# Altium PCB USBDM_SWD_SER_JS16CWJ_shrink.PcbDoc
Units mil, origin at the board's own origin, x right, y up, seen from the top; angles counter-clockwise.
Board outline 1621.65 x 1771.65 mil, 2 copper layers (Top Layer, Bottom Layer); 39 components, 31 nets, 148 pads, 61 vias.
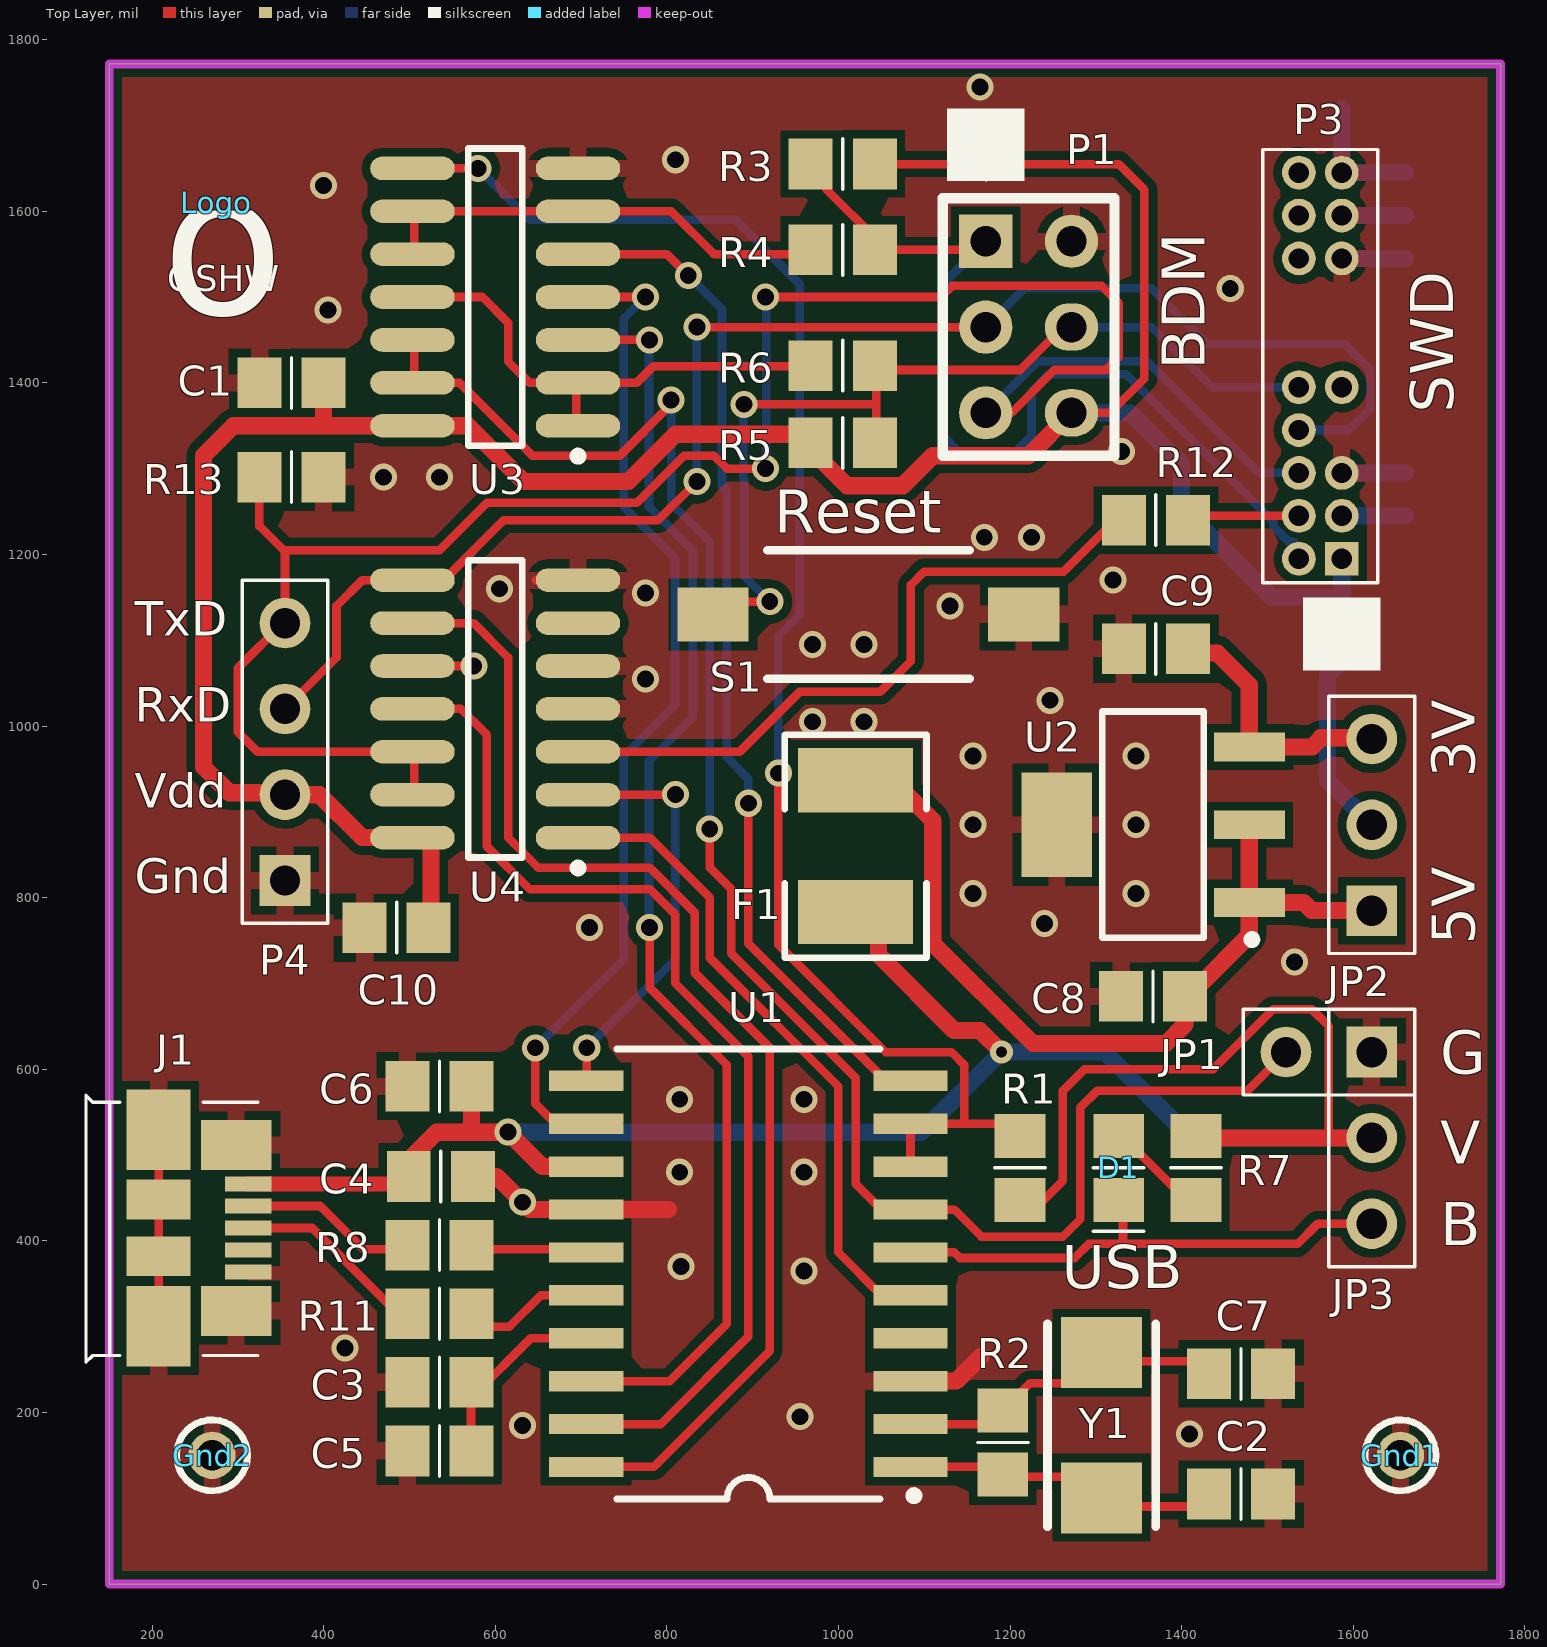
[diagram p0: Top Layer view]
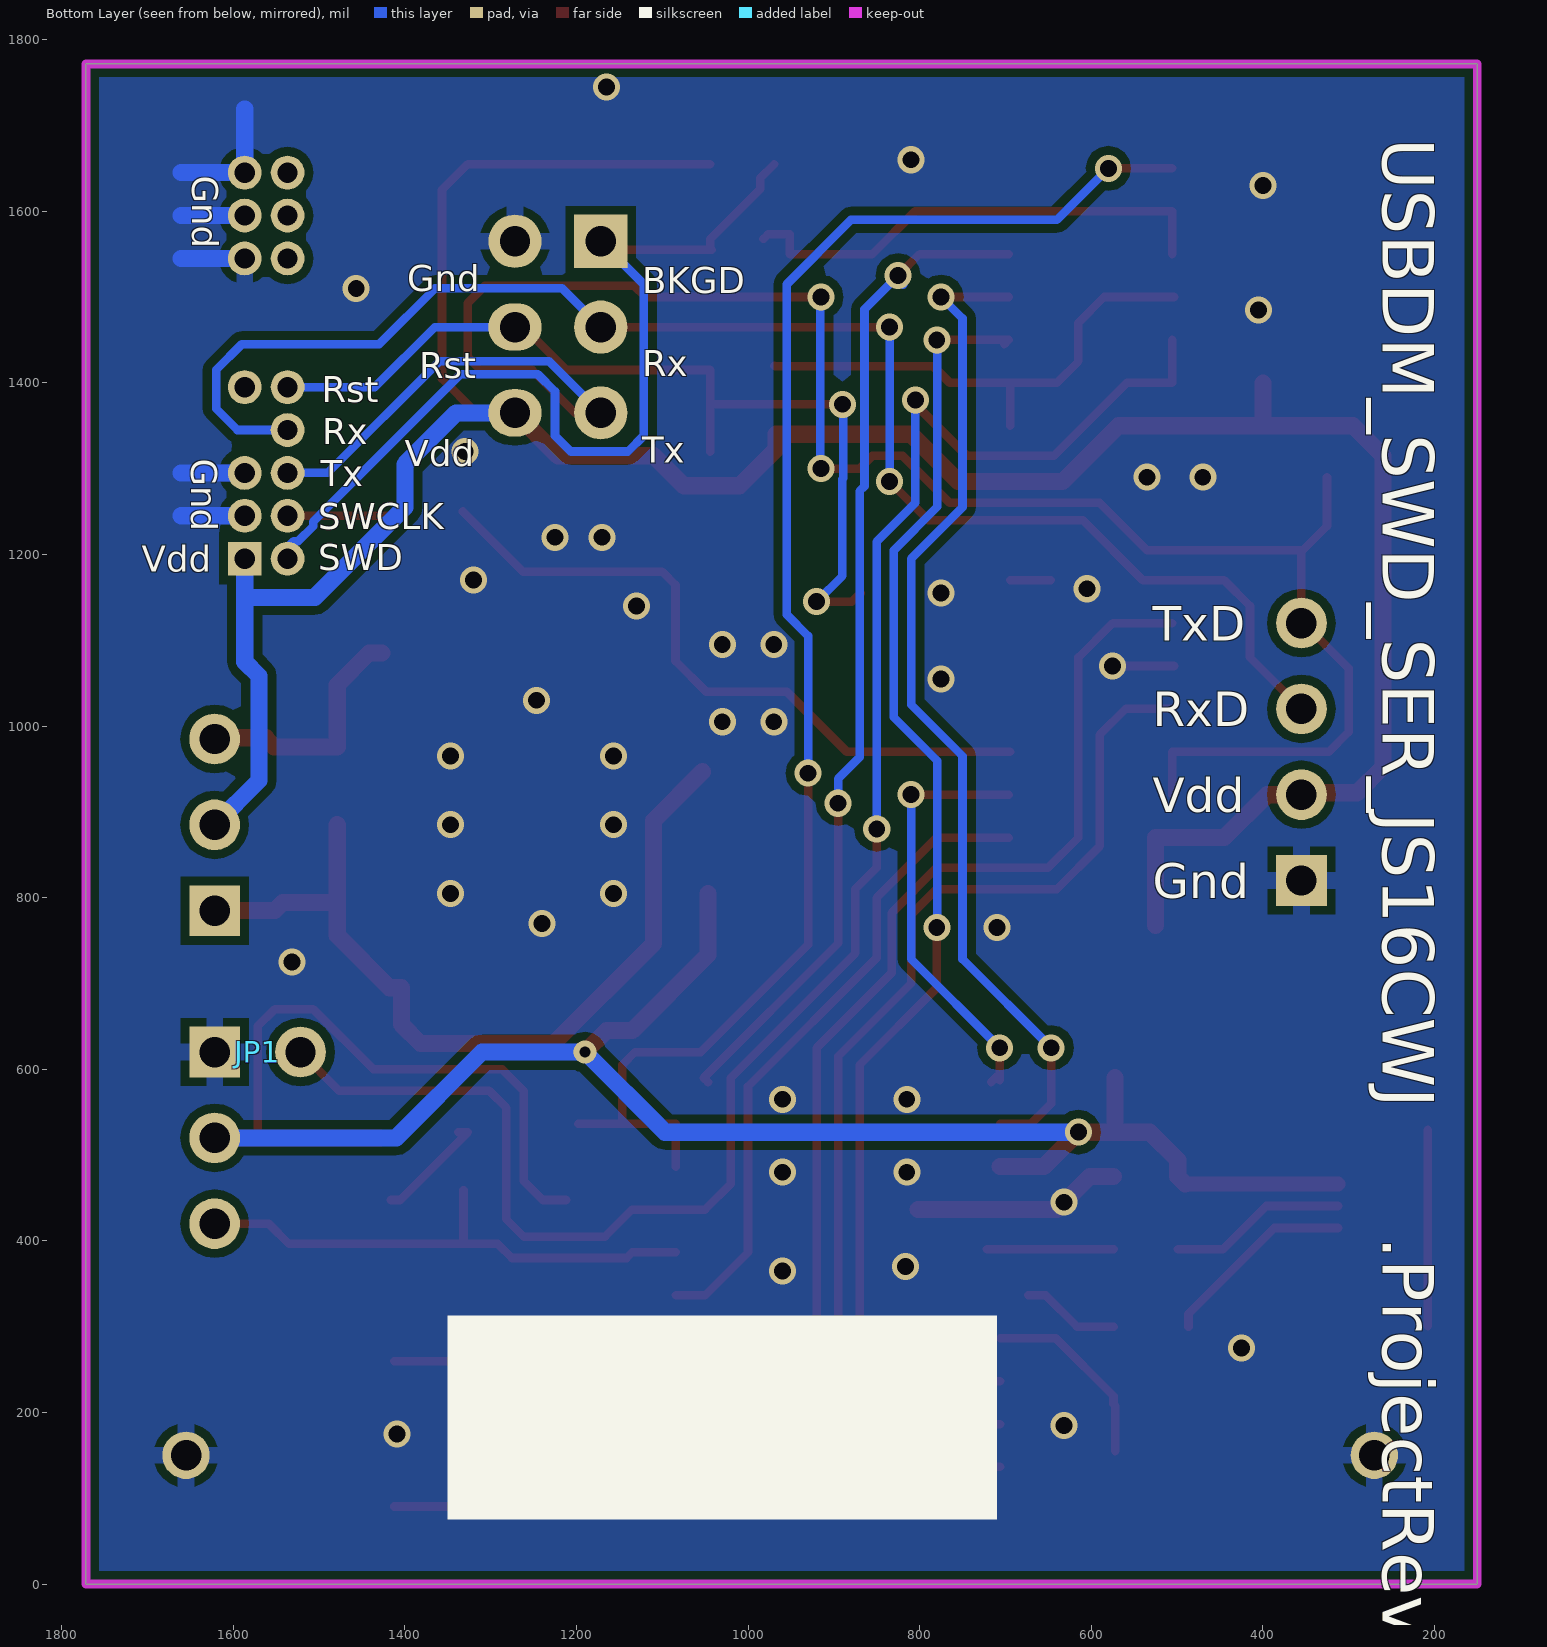
[diagram p1: Bottom Layer view, seen from below]
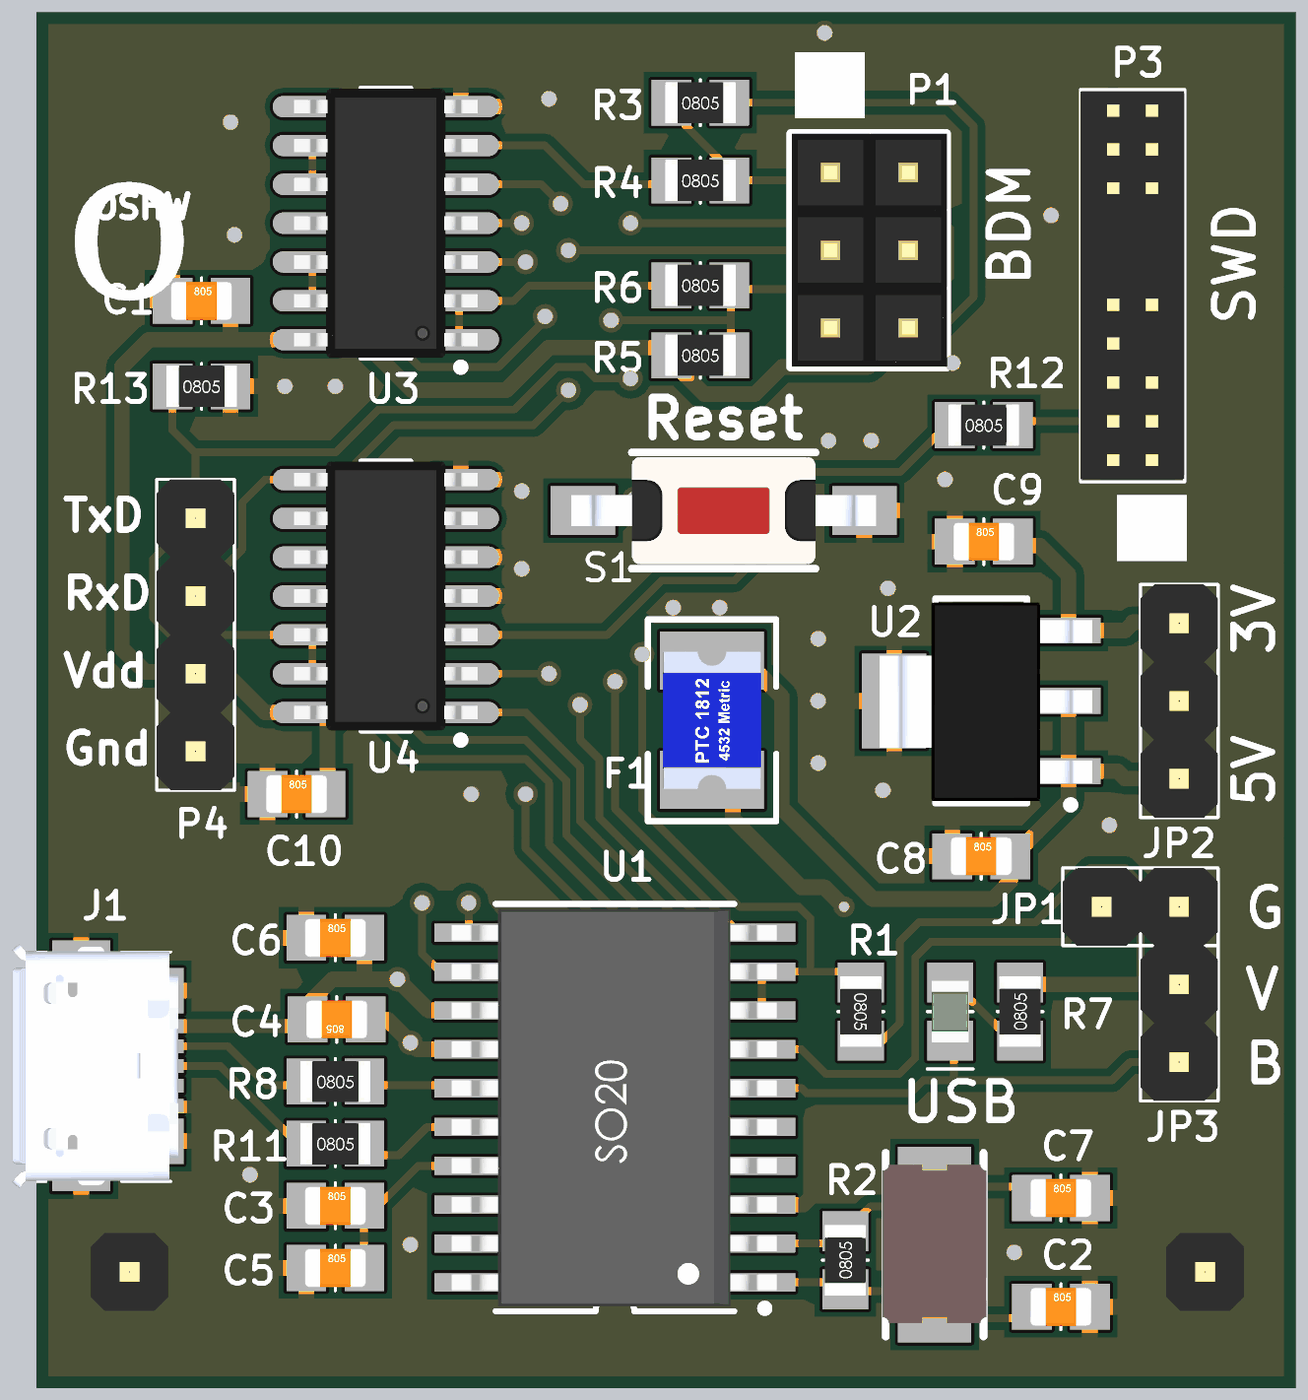
[diagram p2: 3D render of the assembled board from above, using the file's embedded part models]

## Layer stack, top to bottom
Top Solder: solder mask 0.4, Solder Resist, Dk 3.5
Top Layer: signal copper 1.4
Dielectric1: dielectric 12.6, FR-4, Dk 4.8
Bottom Layer: signal copper 1.4
Bottom Solder: solder mask 0.4, Solder Resist, Dk 3.5

## Board outline
150,0 1771.65,0 1771.65,1771.65 150,1771.65

## Design rules (kind name [scope] priority, off if disabled: settings)
Clearance "PolyGon Clearance" [All vs Inpoly] p1: gap=10
Clearance [All] p2: gap=5
FabricationTestPointUsage TestPointUsage [All] p1: valid=0 allowmultiple=FALSE
FabricationTestpoint Testpoint [All] p1: side=3 testpointundercomponent=TRUE minsize=40 maxsize=100 preferedsize=60 minholesize=0 maxholesize=40 preferedholesize=32 testpointgrid=1 allowsidetop=TRUE allowsidebottom=TRUE usegrid=TRUE gridtolerance=0.01
HoleSize [All] p1: absolutevalues=TRUE maxlimit=300 minlimit=1 maxpercent=80.000 minpercent=20.000
PolygonConnect PolygonConnect_1 [InNet('GND') vs isvia] p1: connectstyle=Direct reliefconductorwidth=10 reliefentries=4 polygonreliefangle="90 Angle" airgapwidth=10
PolygonConnect [All] p2: connectstyle=Relief reliefconductorwidth=20 reliefentries=4 polygonreliefangle="90 Angle" airgapwidth=10
RoomDefinition USBDM_SWD_SER_JS16CWJ [InComponentClass('USBDM_SWD_SER_JS16CWJ')] p1: confinementstyle=ConfineIn formatcopy=TRUE lockcomponents=FALSE outline -48.35,-10 1791.65,-10 1791.65,1805 -48.35,1805
RoutingVias [All] p1: holewidth=28 width=50 viastyle="Through Hole" minholewidth=28 minwidth=50 maxholewidth=28 maxwidth=50
SilkToSolderMaskClearance SilkscreenOverComponentPads [IsPad] p1: minsilkscreentomaskgap=10 clearancetoexposedcopper=TRUE
SolderMaskExpansion [All] p1: expansion=4
Width [All] p1: maxlimit=40 minlimit=10 preferedwidth=10
26 further rules are at their usual default settings.

## Components (designator, comment, footprint, x,y, rotation, side; value= is the part's Value field where it differs from the comment)
C1 "470nF" CCNP2012-0805 362.6,1400 r0 top
C2 "18pF" CCNP2012-0805 1469.25,105 r0 top
C3 "470nF" CCNP2012-0805 535,235 r0 top
C4 "470nF" CCNP2012-0805 536.65,475 r180 top
C5 "4u7F/10V" CCNP2012-0805 535,155 r0 top
C6 "4u7F/10V" CCNP2012-0805 535,580 r0 top
C7 "18pF" CCNP2012-0805 1469.25,245 r0 top
C8 "470nF" CCNP2012-0805 1366.65,685 r0 top
C9 "4u7F/10V" CCNP2012-0805 1370,1090 r0 top
C10 "470nF" CCNP2012-0805 485,765 r0 top
D1 "LED Green" LED2012-0805-GREEN 1326.65,485 r270 top
F1 "MINISMDC050F-2" PTC4532-1812 1020,860 r90 top
Gnd1 "TP" "PCBPIN - 0.9mm" 1655,150 r0 top
Gnd2 "TP" "PCBPIN - 0.9mm" 270,150 r0 top
J1 "USB_MICRO_B_CONNECTOR" "MOLEX - 47346-0001" 260,415 r0 top
JP1 "PIN2X1" HDR1X2S 1621.65,620 r0 bottom
JP2 "PIN3X1" HDR1X3S 1621.65,784.87 r90 top
JP3 "PIN3X1" HDR1X3S 1621.65,620 r270 top
Logo "OSHW Logo" OSHW 275,1610 r0 top
P1 "BDM2X3" BDM 1171.65,1565 r270 top
P3 "SWD-2x10" "SWD-2x10 - reduced" 1586.65,1195 r90 top
P4 "Serial" HDR1X4S 355,820 r90 top
R1 "1k5" CR2012-0805 1211.65,485 r270 top
R2 "1M" CR2012-0805 1191.65,165 r90 top
R3 "100K" CR2012-0805 1005,1655 r0 top
R4 "47R" CR2012-0805 1005,1555 r0 top
R5 "100K" CR2012-0805 1005,1330 r0 top
R6 "47R" CR2012-0805 1005,1420 r0 top
R7 "680R" CR2012-0805 1416.65,485 r90 top
R8 "33R" CR2012-0805 535,395 r0 top
R11 "33R" CR2012-0805 535,315 r0 top
R12 "47R" CR2012-0805 1370,1240 r0 top
R13 "100K" CR2012-0805 362.6,1290 r0 top
S1 "SW_PB-SMT-FSMSM" SW_MIN_PB-FSMSM 1035,1130 r180 top
U1 "MC9S08JS16CWJ" SO-G20 895.04,461.46 r90 top
U2 "MC33375ST-3.3T3" SOT223 1366.65,885 r180 top
U3 "SN74LV125AD" SO-14_M 600,1500 r180 top
U4 "SN74LV125AD" SO-14_M 600,1020 r180 top
Y1 "CX5032GB12000H0PESZZ" "XTAL_SMT - 5x3.2" 1306.65,185 r270 top

## Footprints (in the part's own frame and the unit in brackets; to place one, negate y for a bottom-side part, rotate by r counter-clockwise, add the part's x,y. Pads: shape width x height; smd on the part's side, far side on the other; paste and mask are expansions set on the pad)
BDM [mil] "HCS12 style BDM connector"
  rect 62x62 hole 35.43: 1(0,0)
  round 62 hole 35.43: 2(0,100) 3(100,0) 5(200,0)
  oval 55.12x62 hole 35.43: 4(100,100) 6(200,100)
  silkscreen extent -124,-50 250,150, body extent -50,-49 250,151, height 333
CCNP2012-0805 [mm]
  rect 1.3x1.5 smd: 1(-0.95,0) 2(0.95,0)
  silkscreen extent 0,-0.75 0,0.75, body extent -1,-0.62 1,0.63, height 0.78
CR2012-0805 [mm]
  rect 1.3x1.5 smd: 1(-0.95,0) 2(0.95,0)
  silkscreen extent 0,-0.75 0,0.75, body extent -1.15,-0.67 1.15,0.68, height 0.76
HDR1X2S [mm]
  rect 1.5x1.5 hole 0.9: 1(0,0)
  round 1.5 hole 0.9: 2(-2.54,0)
  body extent -3.81,-1.27 1.27,1.27, height 6
HDR1X3S [mm] "Connector; Header; 3 Position; Straight"
  rect 1.5x1.5 hole 0.9: 1(0,0)
  round 1.5 hole 0.9: 2(2.54,0) 3(5.08,0)
  silkscreen extent -1.27,-1.27 6.35,1.27, body extent -1.27,-1.27 6.35,1.27, height 6
HDR1X4S [mm] "Connector; Header; 5 Position; Straight"
  rect 1.5x1.5 hole 0.9: 1(0,0)
  round 1.5 hole 0.9: 2(2.54,0) 3(5.08,0) 4(7.62,0)
  silkscreen extent -1.27,-1.27 8.89,1.27, body extent -1.27,-1.27 8.89,1.27, height 6
LED2012-0805-GREEN [mm] "SMT-LED 0805"
  rect 1.3x1.5 smd: A(-0.95,0) K(0.95,0)
  silkscreen extent 0,-0.75 1.88,0.75, body extent -1,-0.6 1,0.6, height 0.75
"MOLEX - 47346-0001" [mm] "RECEPTACLE, MICRO USB B, BOTTOM MOUNT"
  rect 1.38x0.45 smd: D+(1.33,0) D-(1.33,0.65) G(1.33,-1.3) ID(1.33,-0.65) Vbus(1.33,1.3)
  rect 1.9x2.38 smd: S1(-1.33,2.91) S4(-1.33,-2.91)
  rect 1.9x1.18 smd: S2(-1.33,0.838) S3(-1.33,-0.838)
  rect 2.1x1.48 smd: S5(0.97,2.46) S6(0.97,-2.46)
  silkscreen extent -3.48,-3.98 1.6,3.93, body extent -3.58,-3.99 1.85,3.99, height 2.72
OSHW [mil] "OSHW Logo"
"PCBPIN - 0.9mm" [mm]
  round 1.4 hole 0.9: 1(0,0)
  silkscreen extent -1.05,-1.05 1.05,1.05, body extent -1.27,-1.27 1.27,1.27, height 6
PTC4532-1812 [mm]
  rect 1.9x3.4 smd: 1(-1.95,0) 2(1.95,0)
  silkscreen extent -3.3,-2.1 3.3,2.1, body extent -2.25,-1.6 2.25,1.6, height 0.55
SO-14_M [mm] "14-Pin Small Outline Integrated Circuit 1.27 mm Pitch, IPC Low Density"
  oval 2.5x0.7 smd: 1(-2.45,3.81) 2(-2.45,2.54) 3(-2.45,1.27) 4(-2.45,0) 5(-2.45,-1.27) 6(-2.45,-2.54) 7(-2.45,-3.81) 8(2.45,-3.81) 9(2.45,-2.54) 10(2.45,-1.27) 11(2.45,0) 12(2.45,1.27) 13(2.45,2.54) 14(2.45,3.81)
  silkscreen extent -2.57,-4.4 0.8,4.83, body extent -3,-4.4 3,4.4, height 1.7
SO-G20 [mm] "Small Outline, Plastic; 20 Leads; Body Width 7.5 mm"
  rect 0.6x2.2 smd: 1(-8.255,-4.8) 2(-6.985,-4.8) 3(-5.715,-4.8) 4(-4.445,-4.8) 5(-3.175,-4.8) 6(-1.905,-4.8) 7(-0.635,-4.8) 8(0.635,-4.8) 9(1.905,-4.8) 10(3.175,-4.8) 11(3.175,4.8) 12(1.905,4.8) 13(0.635,4.8) 14(-0.635,4.8) 15(-1.905,4.8) 16(-3.175,4.8) 17(-4.445,4.8) 18(-5.715,4.8) 19(-6.985,4.8) 20(-8.255,4.8)
  silkscreen extent -9.23,-5.03 4.12,3.9, body extent -9.04,-5.29 3.96,5.34, height 2.66
SOT223 [mm] "SOT223, 5-Leads, Body 6.5x3.5mm, Pitch 1.5mm, Lead Span 7mm, IPC High Density"
  rect 2.1x0.85 smd: 1(-2.85,2.3) 2(-2.85,0) 3(-2.85,-2.3)
  rect 2.1x3.1 smd: 4(2.85,0)
  silkscreen extent -3.05,-3.35 1.5,3.52, body extent -3.63,-3.22 3.33,3.28, height 1.7
SW_MIN_PB-FSMSM [mm] "TE CONNECTIVITY / ALCOSWITCH  FSMSM  SWITCH, TACTILE SPST 50mA, SMD GULL WING"
  rect 2.11x1.6 smd: 1(4.6,0) 2(-4.6,0)
  silkscreen extent -3,-1.9 3,1.9, body extent -4.98,-1.75 4.98,1.75, height 4.4
"SWD-2x10 - reduced" [mm] "Connector; SWD; 2x10 Position"
  rect 1x1 hole 0.6: 1(0,0)
  round 1 hole 0.6: 2(0,1.27) 3(1.27,0) 4(1.27,1.27) 5(2.54,0) 6(2.54,1.27) 8(3.81,1.27) 9(5.08,0) 10(5.08,1.27) 15(8.89,0) 16(8.89,1.27) 17(10.16,0) 18(10.16,1.27) 19(11.43,0) 20(11.43,1.27)
  silkscreen extent -2.6,-1.07 12.12,2.34, body extent -0.64,-1.06 12.06,2.34, height 4.5
"XTAL_SMT - 5x3.2" [mm] "Crystal SMT 1368769 or similar"
  rect 2.1x2.4 smd: 1(-2.15,0) 2(2.15,0)
  silkscreen extent -3,-1.6 3,1.6, body extent -2.63,-1.7 2.57,1.7, height 1.3

## Part data
C1 C3 C4 C8 C10: library part Cap, "Capacitor SMT 0805"
C2 C7: library part Cap, "Capacitor SMT"
C5 C6 C9: library part Cap_CCNP_0805, "Capacitor SMT 0805"
D1: library part LED-0805-Green, "LED 0805 Green"
F1: "PolySwitch miniSMDC Series, 500 mA, 1 A, 24 VDC"
Gnd1 Gnd2: "Test Point"
J1: "USB Micro-B Connector"
P3: library part SWD2X10-Reduced, "SWD Connector 2x10-Pin"
P4: library part "Header 4", "Header, 4-Pin"
R1 R2 R3 R4 R5 R6 R7 R8 R11 R12 R13: library part Res, "Resistor SMT"
S1: "SWITCH, TACTILE SPST 50mA, SMD GULL WING"
U1: "Microcontroller with USB"
U2: "Low Dropout 300mA Voltage Regulator with ON/OFF Control"
U3 U4: "Quad 3-state Buffer (5V Tolerant)"
Y1: library part "Crystal - CX5032GB12000H0PESZZ", "AVX CRYSTAL, SM, CX-53F, 12MHZ"

## Via types
v1: diameter 31.5, hole 19.68, Top Layer to Bottom Layer, tented both sides, 60 vias
v2: diameter 27, hole 13, Top Layer to Bottom Layer, tented both sides, 1 vias

## Nets (pads, with @x,y where several pads share a name; then routed paths per layer and width w, separated by ;. In a path a pad name is that pad's centre, name@x,y a point inside that pad or via, vN(x,y) a via of type N, cw(c..) or ccw(c..) an arc to the next point about the centre after c; other vN are vias at no path point)
3V: C9.2 JP2.3 U2.3 | length 286.5
  Top Layer w20: C9.2@1426.77,1085 1441.65,1085 1478.86,1047.8 U2.3 1552.2,975.55 1561.65,985 ; 1561.65,986.36 JP2.3@1621.65,986.36
5V: C4.2 C6.2 F1.1 J1.Vbus JP3.2 R1.2 R7.2 U1.13 | length 2697.3
  Top Layer w10: R1.2 1239.25,447.6 1261.65,470 1261.65,575 1286.65,600 1436.65,600 1506.65,670 1551.65,670 1571.65,650 1571.65,520
  Top Layer w17.72: J1.Vbus C4.2@490.43,466.18
  Top Layer w20: C4.2@490.43,466.18 C4.2 499.25,494.25 531.65,526.65 v1(615,526.65) 655.2,486.46 U1.13 ; 572.4,532.6 C6.2@572.4,590 ; F1.1@1046.65,805 1046.65,733.35 1135,645 1165,645 v2(1190,620) ; R7.2@1429.06,520 1571.65,520 JP3.2
  Bottom Layer w20: v1(615,526.65) 1096.65,526.65 v2(1190,620) 1310,620 1410,520 JP3.2
BKGD/LED: D1.K JP3.3 U1.6 | length 619.1
  Top Layer w10: U1.6 1135.2,386.46 1141.65,380 1275.2,380 1291.65,396.46 1331.65,396.46 ; D1.K@1331.65,458.66 1331.65,396.46 ; JP3.3 1558.54,420 1535,396.46 1331.65,396.46
BKGD/SWD_IO: R4.1 U3.6 U3.9 U3.10 | length 572.4
  Top Layer w10: U3.10@505.51,1550 505.51,1600 805,1600 855,1550 951.25,1550 951.25,1573 976.71,1573 R4.1@981.98,1567.73
BKGD/SWDIO_DRV: U1.12 U3.4 | length 1190.6
  Top Layer w10: v1(646.65,625) 646.65,560 670.2,536.46 U1.12 ; U3.4 v1(775,1500)
  Bottom Layer w10: v1(646.65,625) 750,728.35 750,965 810,1025 810,1195 750,1255 750,1475 v1(775,1500)
BKGD/SWDIO_I: R1.1 U1.8 U1.9 U3.8 | length 1792.5
  Top Layer w10: U3.8@505.51,1650 v1(580,1650) ; v1(930,945) 930,745 1055,620 1131.65,620 1146.65,605 1146.65,536.46 ; U1.8 U1.9 1146.65,536.46 ; R1.1@1197.6,536.46 1146.65,536.46
  Bottom Layer w10: v1(580,1650) 640,1590 880,1590 955,1515 955,1130 930,1105 v1(930,945)
BKGD/SWDIO_O: U1.10 U3.5 | length 1188
  Top Layer w10: U3.5 800,1550 v1(825,1525) ; v1(895,910) 895,746.65 1051.65,590 U1.10@1046.65,585
  Bottom Layer w10: v1@819.25,1514.25 825,1520 v1(825,1525) 864.25,1485.75 864.25,1279.53 870,1273.79 870,963.59 895,938.59 v1(895,910)
GND: C1.1 C2.2 C3.1 C4.1 C5.1 C6.1 C7.2 C8.1 C9.1 C10.1 Gnd1.1 Gnd2.1 J1.G J1.S1 J1.S2 J1.S3 J1.S4 J1.S5 J1.S6 JP1.1 JP3.1 P1.2 P3.3 P3.5 P3.15 P3.17 P3.19 P4.1 R13.2 S1.2 U1.3 U1.14 U2.4 U3.7 U4.4 U4.5 U4.7 U4.10 | length 1128.9
  Top Layer w10: J1.S4 J1.S3 J1.S2 J1.S1 ; U4.10 v1(575,1070) ; U4.7@647.4,1170 U4.7@694.49,1170
  Top Layer w20: C4.1 601.65,475 v1(631.65,445) 640.2,436.46 U1.14 801.65,436.46 ; U1.3 1137.32,236.46 1165.87,265
  Bottom Layer w20: P3.3 1660.65,1245 ; P3.5 1660.65,1295 ; P3.15 1660.65,1545 ; P3.17 1660.65,1595 ; 1586.65,1719 P3.19 1660.65,1645
  other v1: 1409.25,175 631.65,185 955,195 425,275 960,365 816.65,370 815,480 960,480 815,565 960,565 1531.65,725 710,765 1240,770 1156.81,805 1346.65,805 1156.65,885 1346.65,885 1156.81,965 1346.65,965 970,1005 1030,1005 1246.65,1030 775,1055 970,1095 1030,1095 1130,1140 775,1155 605,1160 1320,1170 1170,1220 1225,1220 470,1290 535,1290 1330,1320 405,1485 1456.65,1510 400,1630 810,1660 1165,1745
NetD1_A: D1.A R7.1 | length 133.9
  Top Layer w10: D1.A@1337.91,526.34 1326.65,526.34 1405.39,447.6 R7.1
OSC1: C2.1 R2.1 U1.1 Y1.2 | length 292
  Top Layer w10: U1.1 R2.1@1162.8,136.46 ; R2.1@1204.25,125 1292.6,125 Y1.2@1311.65,105.94 ; Y1.2@1314.25,90.35 C2.1@1412.21,90.35
OSC2: C7.1 R2.2 U1.2 Y1.1 | length 329.6
  Top Layer w10: U1.2 R2.2@1187.6,186.46 ; R2.2 1223.31,234.06 Y1.1@1306.65,234.06 ; Y1.1@1314.25,259.65 C7.1@1412.2,259.65
RST_IO: R6.1 U3.1 U3.2 U3.11 | length 589.8
  Top Layer w10: U3.11 585,1500 615,1470 615,1425 640,1400 694.49,1400 U3.1@694.49,1350 ; U3.2 765,1400 784.25,1419.25 968.5,1419.25 R6.1@969.25,1420
RSTN_I: U1.18 U3.3 | length 1509.2
  Top Layer w10: U3.3@701.46,1445 U3.3 v1(780,1450) ; U1.18 803.11,236.46 870,303.35 870,605 780,695 v1(780,765)
  Bottom Layer w10: v1(780,1450) 779.25,1449.25 779.25,1255.75 830,1205 830,1010 779.25,959.25 779.25,766.65 v1@780.91,765
RSTN_O: JP1.2 U1.7 U3.12 U3.13 | length 2109.5
  Top Layer w10: U3.12@505.51,1450 505.51,1400 558.35,1400 643.35,1315 745,1315 805,1375 v1(805,1380) ; v1(850,880) 850,835 875,810 875,735 1020,590 1020,466.46 1050,436.46 U1.7 1135.2,436.46 1166.65,405 1261.65,405 1281.65,425 1281.65,555 1301.65,575 1476.65,575 JP1.2
  Bottom Layer w10: v1(805,1380) 805,1260 850,1215 v1(850,880)
RXD: U1.19 U4.11 | length 1238.1
  Top Layer w10: U4.11@505.51,1020 560,1020 590,990 590,860 640,810 780,810 810,780 810,700 895,615 895,288.35 793.11,186.46 U1.19
SWDCLK_DRV: U1.5 U4.1 | length 762.9
  Top Layer w10: U4.1 780,870 850,800 850,730 1000,580 1000,386.46 1050,336.46 U1.5
SWDCLK_O: U1.11 U4.2 | length 497.8
  Top Layer w10: U4.2 v1(810,920) ; U1.11@706.65,587.05 v1(706.65,625) ; U1.11@710.63,591.02 U1.11@716.65,585
  Bottom Layer w10: v1(706.65,625) 810,728.35 v1(810,920)
T_BKGD/SWDIO: P1.1 P3.2 R3.1 R4.2 | length 1101.9
  Top Layer w10: R3.1@969.25,1655 985.65,1638.6 985.65,1626 1044.06,1567.6 R4.2@1044.06,1555 ; R4.2 R4.2@1044.06,1555 ; P1.1 1161.65,1555 R4.2@1044.06,1555
  Bottom Layer w10: P1.1 1121.65,1515 1121.65,1338.35 1140,1320 1206.65,1320 1225,1338.35 1225,1390 1245,1410 1335,1410 1506.97,1238.03 1506.97,1232.7 1524.36,1215.31 1529.69,1215.31 1536.65,1208.35 P3.2
T_DBG_RX: P1.3 P3.8 P4.3 U4.8 | length 1786.6
  Top Layer w10: P4.3 415,1080 415,1140 445,1170 U4.8 540,1170 610,1240 790,1240 v1(835,1285) ; v1(835,1465) P1.3
  Bottom Layer w10: v1(835,1285) v1(835,1465) ; P1.3 1216.65,1510 1365,1510 1430,1445 1590,1445 1620,1415 1620,1370 1595,1345 P3.8
T_DBG_TX: P1.5 P3.6 P4.4 R13.1 U4.12 U4.13 | length 2527.5
  Top Layer w10: R13.1 325.2,1233.15 355,1203.35 P4.4@355,1122.31 ; 353.35,1205 535,1205 590,1260 765,1260 820,1315 855,1315 870,1300 v1(915,1300) ; P4.4 P4.4@355,1122.31 ; U4.13@505.51,920 505.51,970 U4.12 323.02,970 300,993.02 300,1067.31 P4.4@355,1122.31 ; v1(915,1500) 1119.65,1500 1132.65,1513 1306.65,1513 1326.65,1493 1326.65,1430 1311.65,1415 1251.65,1415 1201.65,1365 P1.5
  Bottom Layer w10: v1(915,1300) 915.75,1300.75 915.75,1499.25 v1(915,1500) ; P1.5 1231.65,1425 1360,1425 1490,1295 P3.6
T_RSTN: P1.4 P3.10 R5.2 R6.2 S1.1 | length 1089.6
  Top Layer w10: S1.1@868.9,1155 878.9,1145 v1(920,1145) ; v1(890,1375) 1044.06,1375 ; R5.2@1044.06,1320 1044.06,1375 ; P1.4 1261.65,1465 1211.65,1415 1044.06,1415 1044.06,1375
  Bottom Layer w10: v1(890,1375) 889.25,1374.25 889.25,1288.59 890,1287.84 890,1175 v1(920,1145) ; P1.4 1365,1465 1435,1395 P3.10
T_SWDCLK: P3.4 R12.2 | length 129.3
  Top Layer w10: R12.2@1407.4,1245 P3.4
T_SWDCLK_O: R12.1 U4.3 | length 806.1
  Top Layer w10: U4.3@694.49,970 U4.3 885,970 955,1040 1048.74,1040 1084.5,1075.77 1084.5,1164.5 1100,1180 1262.6,1180 R12.1@1332.6,1250
TXD: U1.20 U4.9 | length 1406.8
  Top Layer w10: U4.9@505.51,1120 575,1120 615,1080 615,870 650,835 780,835 832.5,782.5 832.5,712.5 920,625 920,271.72 784.74,136.46 U1.20
USB+: J1.D+ R11.1 | length 230.7
  Top Layer w10: J1.D+ 386.65,415 486.65,315 R11.1@486.65,300
USB-: J1.D- R8.1 | length 207.8
  Top Layer w10: J1.D- 396.06,440.59 446.65,390 R8.1@499.25,390
USBDM: R8.2 U1.15 | length 147.6
  Top Layer w10: R8.2@574.06,390 U1.15@721.65,390
USBDP: R11.2 U1.16 | length 114.2
  Top Layer w10: R11.2@574.06,300 616.65,300 653.11,336.46 U1.16@673.11,336.46
VDD: C8.2 F1.2 JP2.1 U2.1 U2.2 | length 978.3
  Top Layer w20: F1.2@1053.23,946.77 1110,890 1110,746.65 1226.65,630 1381.65,630 1404.06,652.4 1404.06,695 1417.82,695 1478.86,756.04 U2.1 ; U2.2 U2.1 ; JP2.1@1606.33,785 1551.65,785 1542.2,794.45 U2.1
VDD_BDM: C1.2 C10.2 JP2.2 P1.6 P3.1 P4.2 R3.2 R5.1 U3.14 U4.14 | length 3375.4
  Top Layer w10: R3.2@1044.06,1655 1326.65,1655 1356.65,1625 1356.65,1405 1316.65,1365 P1.6
  Top Layer w20: P4.2 395,920 445,870 U4.14 525,870 C10.2@525,767.6 ; P4.2@355,922.31 290,922.31 260,952.31 260,1315 295,1350 U3.14 568.35,1350 633.35,1285 755,1285 810,1340 967.6,1340 967.6,1322.4 1010,1280 1075,1280 1110,1315 1221.65,1315 P1.6 ; 400,1352.4 C1.2
  Bottom Layer w20: P1.6 1340,1365 1400,1305 1400,1255 1505,1150 1586.65,1150 ; P3.1 1586.65,1150 ; JP2.2 1570,936.52 1570,1058.35 1586.65,1075 1586.65,1150
VUSB: C3.2 C5.2 U1.17 | length 221.7
  Top Layer w10: C5.2@571.77,155 C3.2@571.77,207.72 ; C3.2@574.06,210 574.06,219.06 641.46,286.46 U1.17
pads on no net: J1.ID P3.9 P3.16 P3.18 P3.20 U1.4 U4.6

## Polygon pours and split planes (outlines as drawn)
GND on Top Layer "Bottom Layer-GND" (solid, remove dead copper, pour order 1001): 140,-5 140,1780 1771.65,1780 1771.65,-5
GND on Bottom Layer "Top Layer-GND" (solid, remove dead copper, pour order 1000): 140,0 140,1771.65 1771.65,1771.65 1771.65,0

## Keep-outs
Keep-Out Layer:
  the board outline again, w10

## Silkscreen, mask and mechanical layers (free items; w line width, h text height)
Top Overlay:
  rectangle: 1541.65,1065 1631.65,1150
  rectangle: 1126.65,1635 1216.65,1720
  text "BDM" at 1426.65,1415 h50 r90
  text "SWD" at 1716.65,1365 h50 r90
  text "Reset" at 925,1225 h50
  text "TxD" at 180,1105 h40
  text "RxD" at 180,1005 h40
  text "3V" at 1741.65,939.86 h50 r90
  text "Vdd" at 180,905 h40
  text "Gnd" at 180,805 h40
  text "5V" at 1741.65,744.87 h50 r90
  text "G" at 1701.65,595 h50
  text "V" at 1701.65,490 h50
  text "B" at 1701.65,395 h50
  text "USB" at 1260,345 h50
Bottom Overlay:
  rectangle: 710,75 1350,313
  text "USBDM_SWD_SER_JS16CWJ" at 260,1685 h60 r90
  text "Gnd" at 1648.02,1641.63 h30 r90
  text "Gnd" at 1397.02,1506.63 h30
  text "BKGD" at 1123.02,1504.63 h30
  text "Rx" at 1123.02,1407.63 h30
  text "Rst" at 1383.02,1405.63 h30
  text "Rst" at 1497.02,1377.63 h30
  text "Rx" at 1496.02,1328.63 h30
  text "Gnd" at 1649.02,1311.63 h30 r90
  text "Tx" at 1123.02,1306.63 h30
  text "Vdd" at 1400.02,1302.63 h30
  text "Tx" at 1498.02,1279.63 h30
  text "SWCLK" at 1501.02,1229.63 h30
  text "SWD" at 1501.02,1181.63 h30
  text "Vdd" at 1706.65,1180 h30
  text "TxD" at 528.08,1099.53 h40
  text "RxD" at 528.08,999.53 h40
  text "Vdd" at 528.08,899.53 h40
  text "Gnd" at 528.08,799.53 h40
  text ".ProjectRevision" at 260,405 h60 r90

## Dimensions
150,1771.65 to 150,0 on Mechanical 1
150,0 to 1771.65,0 on Mechanical 1

## Text inside footprints (layer, text, board x,y; h text height)
Logo: Top Overlay "o" at 354,1404 h400; Top Overlay "OSHW" at 218,1507 h30